# EAGLE board p2gs-001 (EAGLE 9.6.2)
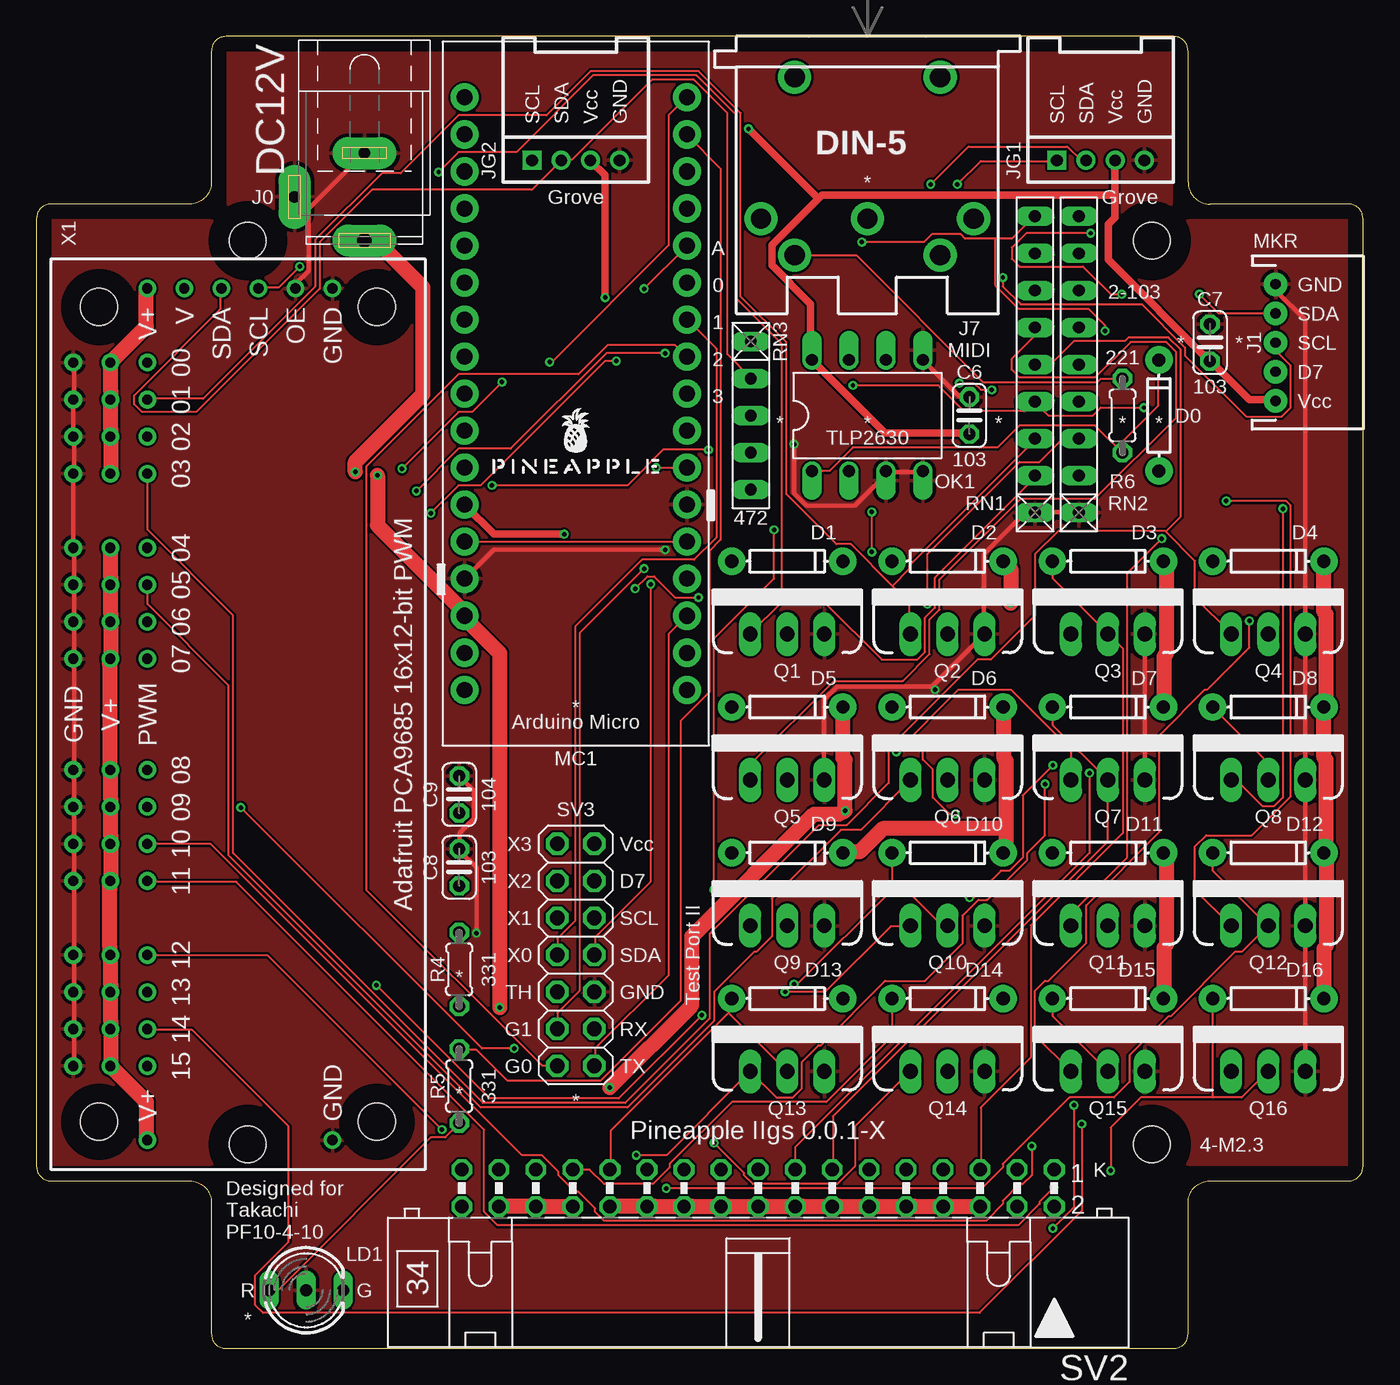
[diagram p0: board, top side]
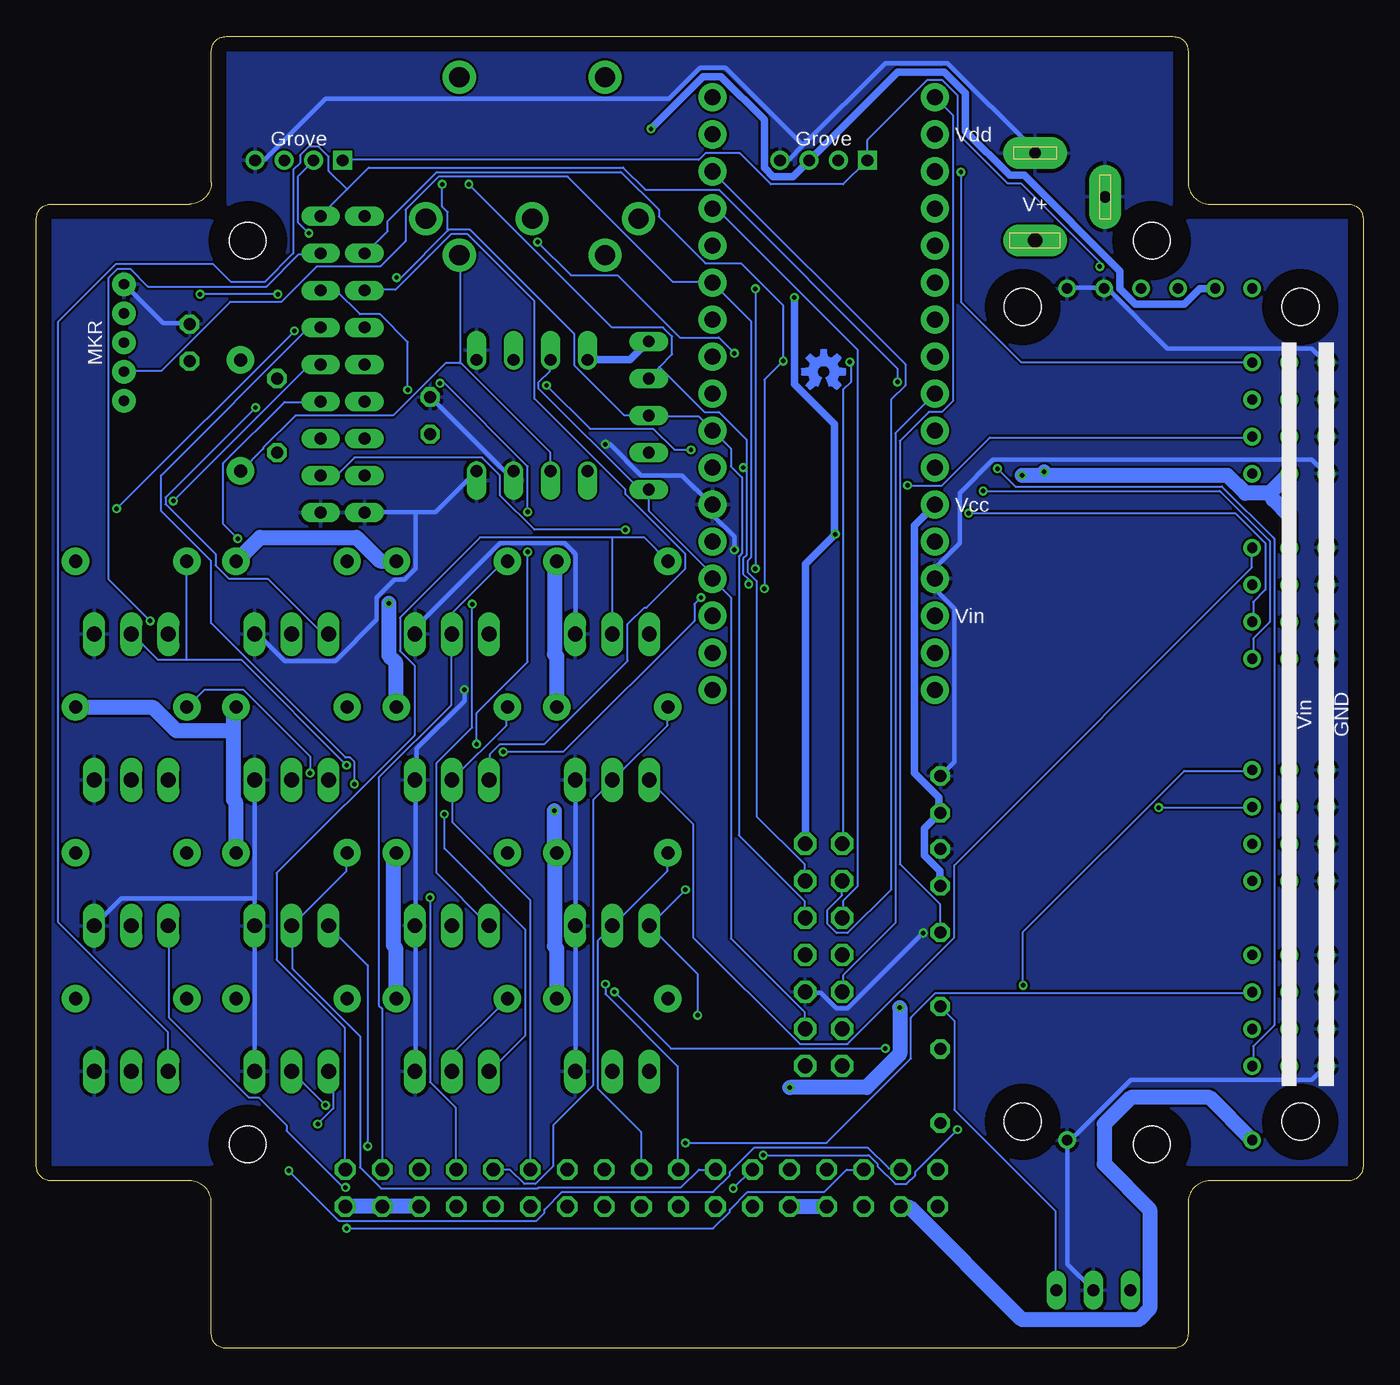
[diagram p1: board, bottom side, seen from below]

Size 91 x 90 mm. Coordinates in mm from the lower left corner, seen from the top.
Outline: 78,90 13,90 arc90 12,89 12,80 arc-90 10.5,78.5 1,78.5 arc90 0,77.5 0,12.5 arc90 1,11.5 10.5,11.5 arc-90 12,10 12,1 arc90 13,0 78,0 arc90 79,1 79,10 arc-90 80.5,11.5 90,11.5 arc90 91,12.5 91,77.5 arc90 90,78.5 80.5,78.5 arc-90 79,80 79,89 arc90 78,90
Copper layers (1*16): Top 0.035mm / dielectric 1.5mm / Bottom 0.035mm
Design rules "SeeedStudio_2layer_DRU_no_angle_20140221": minimum track width 6mil, minimum drill 12mil, track to track 6mil, track to pad 6mil, pad to pad 6mil, via to via 6mil, smd to smd 0mil, copper to edge 10mil, drill to drill 10mil, minimum pad ring 10mil, minimum via ring 6mil, stop-mask expansion 2mil, vias tented up to drill 100mil, thermal gap 10mil
Net classes: 0 default: width 0.152 mm, drill 0.152 mm, clearance 0.152 mm; 1 gnd: width 0.305 mm, drill 0.152 mm, clearance 0.152 mm; 2 power: width 0.508 mm, drill 0.152 mm, clearance 0.152 mm; 3 analog: width 0.305 mm, drill 0.152 mm, clearance 0.152 mm; 4 superpower: width 1.016 mm, drill 0.152 mm, clearance 0.152 mm
Holes 2.5 mm at 76.5,76 14.5,76 76.5,14 14.5,14
tRestrict: area 11.9,73.4 to 17.1,78.6; area 73.9,73.4 to 79.1,78.6; area 73.9,11.4 to 79.1,16.6; area 12,89 to 79,90; area 90,11.5 to 91,78.5; area 12,0 to 79,1; area 0,11.5 to 1,78.5; area 0,77.5 to 12,78.5; area 12,78.5 to 13,90; area 78,78.5 to 79,90; area 79,77.5 to 91,78.5; area 79,11.5 to 91,12.5; 8 more areas
bRestrict: area 11.9,11.4 to 17.1,16.6; area 73.9,11.4 to 79.1,16.6; area 73.9,73.4 to 79.1,78.6; area 11.9,73.4 to 17.1,78.6; area 78,0 to 79,11.5; area 79,11.5 to 91,12.5; area 90,11.5 to 91,78.5; area 79,77.5 to 91,78.5; area 78,78.5 to 79,90; area 12,89 to 79,90; area 12,78.5 to 13,90; area 0,77.5 to 12,78.5; 8 more areas

## Footprints (pad centres in the part's own frame; a part is rotated, then mirrored left to right if it is on the bottom)
C025-024X044 = drill 0.813 octagon: 1 -1.27,0; 2 1.27,0
DIODE-1N4148 = drill 0.9 pad 1.88: A -3.81,0; C 3.81,0
SPC4077 = drill 0.8 pad 2.184 long: 1 -3,0; 2 0,-4.8 | drill 1 pad 2.184 long: 3 3,0
JST-5-PTH = drill 0.7 pad 1.6: 1 -4,0; 2 -2,0; 3 0,0; 4 2,0; 5 4,0
DIN5-RA-PTH = drill 1.4 pad 2.286: 1 7.3,12.5; 2 0,12.5; 3 -7.3,12.5; 4 5,15; 5 -5,15; 6 -5,2.8; 7 5,2.8
4P-2.0-90D = drill 0.8 pad 1.27 square: 1 -3,0 | drill 0.8 pad 1.27: 2 -1,0; 3 1,0; 4 3,0
DUOLED-C-5MM = drill 0.813 long: AR 2.54,0; AX -2.54,0; C 0,0
ARDUINOMICRO = drill 1.1 pad 1.93: P$1 -20.32,7.62; P$2 -17.78,7.62; P$3 -15.24,7.62; P$4 -12.7,7.62; P$5 -10.16,7.62; P$6 -7.62,7.62; P$7 -5.08,7.62; P$8 -2.54,7.62; P$9 0,7.62; P$10 2.54,7.62; P$11 5.08,7.62; P$12 12.7,-7.62; P$13 10.16,-7.62; P$14 12.7,7.62; P$15 15.24,7.62; P$16 17.78,7.62; P$17 20.32,7.62; P$18 20.32,-7.62; P$19 17.78,-7.62; P$20 15.24,-7.62; P$21 7.62,7.62; P$22 10.16,7.62; P$23 7.62,-7.62; P$24 5.08,-7.62; P$25 2.54,-7.62; P$26 0,-7.62; P$27 -2.54,-7.62; P$28 -5.08,-7.62; P$29 -7.62,-7.62; P$30 -10.16,-7.62; P$31 -12.7,-7.62; P$32 -15.24,-7.62; P$33 -17.78,-7.62; P$34 -20.32,-7.62
DIL08 = drill 0.813 offset: 1 -3.81,-3.81; 2 -1.27,-3.81; 3 1.27,-3.81; 4 3.81,-3.81; 5 3.81,3.81; 6 1.27,3.81; 7 -1.27,3.81; 8 -3.81,3.81
TO220V = drill 1.016 long: 1 -2.54,0; 2 0,0; 3 2.54,0
0204/5 = drill 0.813 octagon: 1 -2.54,0; 2 2.54,0
RN-9 = drill 0.813 long: 1 -10.16,0; 2 -7.62,0; 3 -5.08,0; 4 -2.54,0; 5 0,0; 6 2.54,0; 7 5.08,0; 8 7.62,0; 9 10.16,0
RN-5 = drill 0.813 long: 1 -5.08,0; 2 -2.54,0; 3 0,0; 4 2.54,0; 5 5.08,0
ML34L = drill 0.914 octagon: 1 -20.32,-1.27; 2 -20.32,1.27; 3 -17.78,-1.27; 4 -17.78,1.27; 5 -15.24,-1.27; 6 -15.24,1.27; 7 -12.7,-1.27; 8 -12.7,1.27; 9 -10.16,-1.27; 10 -10.16,1.27; 11 -7.62,-1.27; 12 -7.62,1.27; 13 -5.08,-1.27; 14 -5.08,1.27; 15 -2.54,-1.27; 16 -2.54,1.27; 17 0,-1.27; 18 0,1.27; 19 2.54,-1.27; 20 2.54,1.27; 21 5.08,-1.27; 22 5.08,1.27; 23 7.62,-1.27; 24 7.62,1.27; 25 10.16,-1.27; 26 10.16,1.27; 27 12.7,-1.27; 28 12.7,1.27; 29 15.24,-1.27; 30 15.24,1.27; 31 17.78,-1.27; 32 17.78,1.27; 33 20.32,-1.27; 34 20.32,1.27
2X07 = drill 1.016 octagon: 1 -7.62,-1.27; 2 -7.62,1.27; 3 -5.08,-1.27; 4 -5.08,1.27; 5 -2.54,-1.27; 6 -2.54,1.27; 7 0,-1.27; 8 0,1.27; 9 2.54,-1.27; 10 2.54,1.27; 11 5.08,-1.27; 12 5.08,1.27; 13 7.62,-1.27; 14 7.62,1.27
ADAFRUIT-PCA9685-FOOTPRINT = drill 0.7 pad 1: GND00 -24.13,1.524; GND01 -21.59,1.524; GND02 -19.05,1.524; GND03 -16.51,1.524; GND04 -11.43,1.524; GND05 -8.89,1.524; GND06 -6.35,1.524; GND07 -3.81,1.524; GND08 3.81,1.524; GND09 6.35,1.524; GND10 8.89,1.524; GND11 11.43,1.524; GND12 16.51,1.524; GND13 19.05,1.524; GND14 21.59,1.524; GND15 24.13,1.524; LGND -29.21,19.304; LOE -29.21,16.764; LSCL -29.21,14.224; LSDA -29.21,11.684; LV+ -29.21,6.604; LVCC -29.21,9.144; PWM00 -24.13,6.604; PWM01 -21.59,6.604; PWM02 -19.05,6.604; PWM03 -16.51,6.604; PWM04 -11.43,6.604; PWM05 -8.89,6.604; PWM06 -6.35,6.604; PWM07 -3.81,6.604; PWM08 3.81,6.604; PWM09 6.35,6.604; PWM10 8.89,6.604; PWM11 11.43,6.604; PWM12 16.51,6.604; PWM13 19.05,6.604; PWM14 21.59,6.604; PWM15 24.13,6.604; RGND 29.21,19.304; RV+ 29.21,6.604; V+00 -24.13,4.064; V+01 -21.59,4.064; V+02 -19.05,4.064; V+03 -16.51,4.064; V+04 -11.43,4.064; V+05 -8.89,4.064; V+06 -6.35,4.064; V+07 -3.81,4.064; V+08 3.81,4.064; V+09 6.35,4.064; V+10 8.89,4.064; V+11 11.43,4.064; V+12 16.51,4.064; V+13 19.05,4.064; V+14 21.59,4.064; V+15 24.13,4.064 | hole 2.54: -27.94,3.302; 27.94,3.302; -27.94,22.352; 27.94,22.352

## Placement (x,y rotation side)
C6  10n  [C025-024X044]  64,64 90 top
C7  10n  [C025-024X044]  80.5,69 90 top
C8  10n  [C025-024X044]  29,33 90 top
C9  100n  [C025-024X044]  29,38 90 top
D0  [DIODE-1N4148]  77,64 90 top
D1  200mA/100V/1V  [DIODE-1N4148]  51.5,54 0 top
D2  200mA/100V/1V  [DIODE-1N4148]  62.5,54 0 top
D3  200mA/100V/1V  [DIODE-1N4148]  73.5,54 0 top
D4  200mA/100V/1V  [DIODE-1N4148]  84.5,54 0 top
D5  200mA/100V/1V  [DIODE-1N4148]  51.5,44 0 top
D6  200mA/100V/1V  [DIODE-1N4148]  62.5,44 0 top
D7  200mA/100V/1V  [DIODE-1N4148]  73.5,44 0 top
D8  200mA/100V/1V  [DIODE-1N4148]  84.5,44 0 top
D9  200mA/100V/1V  [DIODE-1N4148]  51.5,34 0 top
D10  200mA/100V/1V  [DIODE-1N4148]  62.5,34 0 top
D11  200mA/100V/1V  [DIODE-1N4148]  73.5,34 0 top
D12  200mA/100V/1V  [DIODE-1N4148]  84.5,34 0 top
D13  200mA/100V/1V  [DIODE-1N4148]  51.5,24 0 top
D14  200mA/100V/1V  [DIODE-1N4148]  62.5,24 0 top
D15  200mA/100V/1V  [DIODE-1N4148]  73.5,24 0 top
D16  200mA/100V/1V  [DIODE-1N4148]  84.5,24 0 top
J0  12V  [SPC4077]  22.5,79 270 top
J1  MKR  [JST-5-PTH]  85,69 270 top
J7  DIN5  [DIN5-RA-PTH]  57,90 180 top
JG1  Grove/1  [4P-2.0-90D]  73,81.5 0 top
JG2  Grove/2  [4P-2.0-90D]  37,81.5 0 top
LD1  Red/Green  [DUOLED-C-5MM]  18.5,4 0 top
LOGO1  OSHW-LOGOS-COPPER  [OSHW-LOGO-S_COPPER]  37,67 0 bottom
MC1  ARDUINOMICRO  [ARDUINOMICRO]  37,65.5 270 top
OK1  HCPL2630  [DIL08]  57,64 0 top
Q1  60V/32A/35mΩ  [TO220V]  51.5,49 0 top
Q2  60V/32A/35mΩ  [TO220V]  62.5,49 0 top
Q3  60V/32A/35mΩ  [TO220V]  73.5,49 0 top
Q4  60V/32A/35mΩ  [TO220V]  84.5,49 0 top
Q5  60V/32A/35mΩ  [TO220V]  51.5,39 0 top
Q6  60V/32A/35mΩ  [TO220V]  62.5,39 0 top
Q7  60V/32A/35mΩ  [TO220V]  73.5,39 0 top
Q8  60V/32A/35mΩ  [TO220V]  84.5,39 0 top
Q9  60V/32A/35mΩ  [TO220V]  51.5,29 0 top
Q10  60V/32A/35mΩ  [TO220V]  62.5,29 0 top
Q11  60V/32A/35mΩ  [TO220V]  73.5,29 0 top
Q12  60V/32A/35mΩ  [TO220V]  84.5,29 0 top
Q13  60V/32A/35mΩ  [TO220V]  51.5,19 0 top
Q14  60V/32A/35mΩ  [TO220V]  62.5,19 0 top
Q15  60V/32A/35mΩ  [TO220V]  73.5,19 0 top
Q16  60V/32A/35mΩ  [TO220V]  84.5,19 0 top
R4  330  [0204/5]  29,26 90 top
R5  330  [0204/5]  29,18 90 top
R6  220  [0204/5]  74.5,64 90 top
RN1  10k  [RN-9]  68.5,67.5 90 top
RN2  10k  [RN-9]  71.5,67.5 90 top
RN3  4.7k  [RN-5]  49,64 270 top
SV2  LD  [ML34L]  49.5,11 180 top
SV3  Testport II  [2X07]  37,27 90 top
U$1  PINEAPPLE450_SILK  [PINEAPPLE450_SILK]  37,60 0 top
X1  ADAFRUIT-PCA9685  [ADAFRUIT-PCA9685-FOOTPRINT]  1,43.5 270 top

## Library data of the parts
C6-C9 R4-R6 = resistor
D0 D1-D16 = SparkFun-DiscreteSemi; PROD_ID: DIO-08378
J0 = con-jack; OC_FARNELL: unknown; OC_NEWARK: unknown
J1 = SparkFun-Connectors; SF_ID: PRT-09917
J7 = SparkFun-Connectors; PROD_ID: CONN-09481
JG1 JG2 = Connector
LD1 = led
LOGO1 = SparkFun-Aesthetics
MC1 = adafruit
OK1 = optocoupler; MF: AGILENT TECHNOLOGIES; MPN: HCPL-2630-000E; OC_FARNELL: 9994904; OC_NEWARK: 88H7813
Q1-Q16 = SparkFun-DiscreteSemi; PROD_ID: TRANS-10060
RN1-RN3 = resistor-net; OC_FARNELL: unknown; OC_NEWARK: unknown
SV2 = con-ml; OC_FARNELL: unknown; OC_NEWARK: unknown
SV3 = pinhead
U$1 = pineapple
X1 = adafruit-pca9685

## Nets
ANLG0 [analog]: MC1.P$31
ANLG1 [analog]: MC1.P$30
ANLG2 [analog]: MC1.P$29
ANLG3 [analog]: MC1.P$28
AREF: MC1.P$32
D7GATE: J1.4 MC1.P$6 SV3.11
DTCT0: MC1.P$7 SV3.8
DTCT1: MC1.P$4 SV3.10
DTCT2: MC1.P$3 SV3.12
DTCT3: MC1.P$1 SV3.14
GND [gnd]: C6.2 C7.2 C8.2 C9.2 J0.1 J0.2 J1.1 JG1.4 JG2.4 LD1.C MC1.P$12 MC1.P$21 OK1.3 OK1.4 OK1.5 Q1.3 Q2.3 Q3.3 Q4.3 Q5.3 Q6.3 Q7.3 Q8.3 Q9.3 Q10.3 Q11.3 Q12.3 Q13.3 Q14.3 Q15.3 Q16.3 RN1.1 RN2.1 SV3.5 X1.GND00 X1.GND01 X1.GND02 X1.GND03 X1.GND04 X1.GND05 X1.GND06 X1.GND07 X1.GND08 X1.GND09 X1.GND10 X1.GND11 X1.GND12 X1.GND13 X1.GND14 X1.GND15 X1.LGND X1.LOE X1.RGND
GPIO0: MC1.P$8 SV3.2
GPIO1: MC1.P$5 SV3.4
LD00: D1.A Q1.2 SV2.1
LD01: D2.A Q2.2 SV2.3
LD02: D3.A Q3.2 SV2.5
LD03: D4.A Q4.2 SV2.7
LD04: D5.A Q5.2 SV2.9
LD05: D6.A Q6.2 SV2.11
LD06: D7.A Q7.2 SV2.13
LD07: D8.A Q8.2 SV2.15
LD08: D9.A Q9.2 SV2.17
LD09: D10.A Q10.2 SV2.19
LD10: D11.A Q11.2 SV2.21
LD11: D12.A Q12.2 SV2.23
LD12: D13.A Q13.2 SV2.25
LD13: D14.A Q14.2 SV2.27
LD14: D15.A Q15.2 SV2.29
LD15: D16.A Q16.2 SV2.31
LED0: MC1.P$34 R4.2
LED0A: LD1.AR R4.1
LED1: MC1.P$2 R5.2
LED1A: LD1.AX R5.1
MIDIINSND: D0.C OK1.1 R6.1
MIRTN: D0.A J7.5 OK1.2
MISND: J7.4 R6.2
MISO: MC1.P$19
MNTR: MC1.P$27
MOSI: MC1.P$17
PWM00: Q1.1 RN1.2 X1.PWM00
PWM01: Q2.1 RN1.3 X1.PWM01
PWM02: Q3.1 RN1.4 X1.PWM02
PWM03: Q4.1 RN1.5 X1.PWM03
PWM04: Q5.1 RN1.6 X1.PWM04
PWM05: Q6.1 RN1.7 X1.PWM05
PWM06: Q7.1 RN1.8 X1.PWM06
PWM07: Q8.1 RN1.9 X1.PWM07
PWM08: Q9.1 RN2.2 X1.PWM08
PWM09: Q10.1 RN2.3 X1.PWM09
PWM10: Q11.1 RN2.4 X1.PWM10
PWM11: Q12.1 RN2.5 X1.PWM11
PWM12: Q13.1 RN2.6 X1.PWM12
PWM13: Q14.1 RN2.7 X1.PWM13
PWM14: Q15.1 RN2.8 X1.PWM14
PWM15: Q16.1 RN2.9 X1.PWM15
RLY: MC1.P$9
RST: MC1.P$13 MC1.P$22
RX: MC1.P$14 OK1.7 RN3.5 SV3.3
SCK: MC1.P$18
SCL: J1.3 JG1.1 JG2.1 MC1.P$10 RN3.3 SV3.9 X1.LSCL
SDA: J1.2 JG1.2 JG2.2 MC1.P$11 RN3.2 SV3.7 X1.LSDA
THS: MC1.P$26 SV3.6
TX: MC1.P$15 SV3.1
VCC [power]: C6.1 C7.1 C8.1 C9.1 J1.5 JG1.3 JG2.3 MC1.P$23 OK1.8 RN3.1 SV3.13 X1.LVCC
VDD [power]: MC1.P$33
VIN [superpower]: D1.C D2.C D3.C D4.C D5.C D6.C D7.C D8.C D9.C D10.C D11.C D12.C D13.C D14.C D15.C D16.C J0.3 MC1.P$20 SV2.2 SV2.4 SV2.6 SV2.8 SV2.10 SV2.12 SV2.14 SV2.16 SV2.18 SV2.20 SV2.22 SV2.24 SV2.26 SV2.28 SV2.30 SV2.32 X1.LV+ X1.RV+ X1.V+00 X1.V+01 X1.V+02 X1.V+03 X1.V+04 X1.V+05 X1.V+06 X1.V+07 X1.V+08 X1.V+09 X1.V+10 X1.V+11 X1.V+12 X1.V+13 X1.V+14 X1.V+15

## Tracks (layer width: path | path; a pad name or v marks a point on that pad's centre or on a via)
D7GATE
  Bottom 0.152: SV3.11 38.33,32.08 38.33,33.22 41.6,36.5 41.6,52.65 42.22,53.26 42.22,54.03 41.99,54.25 41.99,70.48 44.58,73.08 MC1.P$6 44.65,73.15 47.32,73.15 54.56,80.39 63.4,80.39 65.68,78.11 65.68,75.97 67.44,74.22 71.78,74.22 74.22,71.78 77.72,71.78 82.45,67.06 84.96,67.06 J1.4
DTCT0
  Top 0.152: SV3.8 35.74,27.05 35.74,28.12 36.96,29.34 36.96,49.53 41.53,54.1 45.11,54.1 46.63,55.63 46.63,68.58 44.65,70.56 MC1.P$7
DTCT1
  Bottom 0.152: SV3.10 35.66,29.57 35.66,30.71 34.67,31.7 34.67,68.5 44.35,78.18 44.58,78.18 MC1.P$4
DTCT2
  Bottom 0.152: SV3.12 35.74,32 35.74,31.09 36.73,30.1 36.73,29.11 36.12,28.5 35.36,28.5 32.38,31.47 32.38,65.08 31.39,66.06 31.39,67.51 44.58,80.7 MC1.P$3
DTCT3  (via drill 0.3)
  Top 0.152: v35.2,67.67 35.36,67.67 43.36,75.67 43.36,84.58 44.58,85.8 MC1.P$1
  Bottom 0.152: v35.2,67.67 35.13,67.59 35.13,66.29 35.66,65.76 35.66,34.67 SV3.14
GND  (via drill 0.3)
  Top 0.305: Q3.3 76.05,39.01 Q7.3 | Q16.3 87.02,19.05 87.02,28.96 Q12.3 87.02,29.11 87.02,38.94 Q8.3 87.02,39.09 87.02,49 Q4.3 87.02,49.15 87.02,70.56 85.04,72.54 85.04,73 J1.1 | RN2.1 71.48,57.38 68.5,57.38 RN1.1 68.35,57.3 67.82,57.3 65,54.48 65,49.07 Q2.3 64.92,48.92 61.42,45.41 | OK1.4 60.81,60.12 58.29,60.12 OK1.3 58.29,59.97 56.16,57.84 52.81,57.84 51.97,58.67 v51.97,62.03 | C6.2 63.93,65.3 63.32,65.3 60.88,67.74 OK1.5 | 61.42,45.41 54.94,45.41 54.03,44.5 54.03,39.01 Q5.3 | 61.42,45.41 v61.65,45.19 | X1.LOE 17.83,72.77 17.83,73.08 18.67,73.91 18.67,78.03 17.75,78.94 J0.2 18.67,78.18 22.48,81.99 J0.1 | C9.2 29.03,39.24 30.02,38.25 30.02,36.35 29.03,35.36 29.03,34.29 C8.2 29.03,34.14 30.18,32.99 v30.18,28.5 | v43.13,54.79 31.39,54.79 29.41,52.81 MC1.P$12 | X1.GND00 2.59,67.59 2.59,65.15 X1.GND01 2.52,65 2.52,62.64 X1.GND02 2.59,62.48 2.59,60.05 X1.GND03 2.52,59.89 2.52,55.02 X1.GND04 2.59,54.86 2.59,52.5 X1.GND05 2.59,52.35 2.59,49.99 X1.GND06 2.59,49.84 2.59,47.32 X1.GND07 2.59,47.17 2.59,39.78 X1.GND08 2.59,39.62 2.59,37.26 X1.GND09 2.59,37.11 2.59,34.75 X1.GND10 2.59,34.59 2.59,32.08 X1.GND11 2.59,31.93 2.59,27.13 X1.GND12 2.59,26.98 2.59,24.54 X1.GND13 2.59,24.38 2.59,22.02 X1.GND14 2.59,21.87 2.59,19.43 X1.GND15
  Bottom 0.305: Q15.3 76.05,19.05 76.05,28.96 Q11.3 76.05,29.11 76.05,30.86 | 76.05,30.86 76.05,38.94 Q7.3 | C7.2 80.54,70.33 82.3,70.33 84.96,73 J1.1 | 76.05,30.86 85.19,30.86 87.02,29.03 Q12.3 | Q14.3 65,19.05 65,28.96 Q10.3 65,29.11 65,38.94 Q6.3 64.92,39.09 64.92,41.15 61.65,44.42 v61.65,45.19 | Q13.3 54.03,19.05 54.03,28.96 Q9.3 54.03,29.11 54.03,38.94 Q5.3 | Q1.3 54.03,49.07 54.03,54.48 54.79,55.24 59.21,55.24 65,49.45 65,49.07 Q2.3 | OK1.3 58.29,60.2 58.9,60.2 63.93,65.23 C6.2 | 65,57.38 63.63,57.38 60.88,60.12 OK1.4 | 65,57.38 68.43,57.38 RN1.1 | 65,57.38 65,53.49 65.76,52.73 66.45,52.73 67.67,51.51 67.67,49.99 70.48,47.17 73.99,47.17 75.82,49 75.97,49 Q3.3 | X1.LGND 20.27,72.77 17.83,72.77 X1.LOE 17.68,72.62 17.45,72.62 13.41,68.58 3.5,68.58 2.59,67.67 X1.GND00 | 38.41,82.53 32.77,88.16 28.5,88.16 22.55,82.22 22.55,82.07 J0.1 | 38.41,82.53 39.4,81.53 39.93,81.53 JG2.4 | 38.41,82.53 43.74,87.86 45.49,87.86 47.62,85.72 71.17,85.72 75.36,81.53 75.97,81.53 JG1.4 | v30.18,28.5 35.36,23.32 36.12,23.32 37.19,24.38 38.25,24.38 SV3.5 | C9.2 28.96,39.32 28.04,40.23 28.04,50.75 29.34,52.05 29.34,52.73 MC1.P$12 29.26,52.88 29.26,53.65 27.66,55.24 27.66,58.67 25.38,60.96 3.5,60.96 2.59,60.05 X1.GND03 | v43.13,54.79 43.13,55.7 44.58,57.15 44.58,57.84 MC1.P$21 44.73,57.91 46.71,59.89 49.53,59.89 51.66,62.03 v51.97,62.03 | LD1.C 18.52,4.04 20.27,5.79 20.27,14.25 X1.RGND 20.12,14.25 15.93,18.44 3.5,18.44 2.59,19.36 X1.GND15
  pour Top: -1,-1 92,-1 92,91 -0.5,91 -1,91
  pour Bottom: -2,-2 93,-2 93,92 -2,92
GPIO0
  Top 0.152: SV3.2 35.66,19.43 34.67,19.43 22.63,31.47 22.63,60.5 28.96,66.83 37.19,66.83 39.17,68.81 43.81,68.81 44.58,68.05 MC1.P$8
GPIO1  (via drill 0.3)
  Top 0.152: v41.68,53.49 37.26,49.07 37.26,24.54 35.74,23.01 35.74,21.95 SV3.4 | v41.68,72.69 44.58,75.59 MC1.P$5
  Bottom 0.152: v41.68,72.69 v41.68,53.49
LD00
  Bottom 0.152: 51.51,55.63 49.3,55.63 47.7,54.03 D1.A | 51.51,55.63 60.58,55.63 66.06,50.14 66.06,47.85 65.08,46.86 65.08,42.06 74.52,32.61 74.52,26.67 69.88,22.02 69.88,12.34 SV2.1 | 51.51,55.63 51.51,49.07 Q1.2
LD01
  Bottom 0.152: SV2.3 67.28,12.34 67.28,23.32 67.51,23.55 67.51,39.17 62.56,44.12 62.56,49 Q2.2 62.48,49.07 62.48,50.44 58.98,53.95 58.75,53.95 D2.A
LD02
  Top 0.152: SV2.5 64.77,12.34 64.77,16.54 68.2,19.96 68.2,29.03 74.52,35.36 74.52,48.01 73.53,49 Q3.2 73.46,49.07 69.72,52.81 69.72,53.95 D3.A
LD03  (via drill 0.3)
  Top 0.152: v64.01,30.94 64.31,30.94 66.14,32.77 66.75,32.77 67.67,33.68 67.67,37.95 v69.72,40.01
  Bottom 0.152: v64.01,30.94 64.01,18.29 62.26,16.54 62.26,12.34 SV2.7 | v69.72,40.01 76.96,47.24 80.7,47.24 | 80.7,47.24 82.68,47.24 84.43,49 Q4.2 | 80.7,47.24 80.7,53.95 D4.A
LD04
  Bottom 0.152: SV2.9 59.59,12.27 58.52,12.27 57.53,11.28 56.77,11.28 55.55,12.5 55.55,15.32 52.81,18.06 52.81,37.64 51.51,38.94 Q5.2 51.44,39.01 47.7,42.75 47.7,43.97 D5.A
LD05
  Bottom 0.152: SV2.11 57.15,12.34 57.15,30.79 62.48,36.12 62.48,38.94 Q6.2 62.48,39.01 58.75,42.75 58.75,43.97 D6.A
LD06
  Top 0.152: SV2.13 54.63,12.34 54.63,15.93 73.46,34.75 73.46,38.94 Q7.2 73.46,39.01 69.72,42.75 69.72,43.97 D7.A
LD07  (via drill 0.3)
  Top 0.152: v72.24,39.47 72.24,33.98 52.05,13.79 52.05,12.34 SV2.15 | Q8.2 84.43,39.01 84.43,40.23 80.7,43.97 D8.A
  Bottom 0.152: v72.24,39.47 72.24,40.62 76.81,45.19 79.48,45.19 80.62,44.04 D8.A
LD08
  Bottom 0.152: SV2.17 49.53,12.34 49.53,14.86 52.5,17.83 52.5,27.96 51.51,28.96 Q9.2 51.44,29.03 47.7,32.77 47.7,33.98 D9.A
LD09  (via drill 0.3)
  Top 0.152: v51.97,24.99 52.2,24.99 58.64,31.43 | 58.64,31.43 58.67,31.47 58.67,33.98 D10.A | Q10.2 62.48,29.03 62.1,29.03 59.74,31.39 58.67,31.39 58.64,31.43
  Bottom 0.152: v51.97,24.99 51.97,24.31 47.02,19.36 47.02,12.34 SV2.19
LD10
  Bottom 0.152: SV2.21 45.57,12.27 46.79,11.05 56.54,11.05 56.62,10.97 67.36,10.97 68.81,12.42 68.81,21.41 73.46,26.06 73.46,28.96 Q11.2 73.46,29.03 69.72,32.77 69.72,33.98 D11.A
LD11  (via drill 0.3)
  Top 0.152: v43.2,10.97 64.85,10.97 66.29,12.42 66.29,12.65 70.87,17.22 73.91,17.22 74.98,18.29 74.98,20.12 77.65,22.78 77.8,22.78 82.22,27.2 82.68,27.2 84.43,28.96 Q12.2 84.43,29.03 80.7,32.77 80.7,33.98 D12.A
  Bottom 0.152: v43.2,10.97 41.91,12.27 SV2.23
LD12
  Top 0.152: 47.47,23.01 47.62,23.16 47.62,23.93 D13.A | 47.47,23.01 39.4,14.94 39.4,12.34 SV2.25 | 47.47,23.01 51.44,19.05 Q13.2
LD13
  Top 0.152: SV2.27 37.95,12.27 38.94,11.28 42.29,11.28 43.43,12.42 43.43,12.65 47.7,16.92 54.18,16.92 58.67,21.41 58.67,23.93 D14.A
  Bottom 0.152: Q14.2 62.48,19.05 62.48,20.19 58.75,23.93 D14.A
LD14  (via drill 0.3)
  Top 0.152: v69.72,8.23 71.17,9.68 v71.17,16.69 | D15.A 69.72,23.93 69.72,22.78 73.46,19.05 Q15.2
  Bottom 0.152: v69.72,8.23 44.58,8.23 43.43,9.37 43.43,9.53 42.22,10.74 36.96,10.74 35.43,12.27 34.29,12.27 SV2.29 | v71.17,16.69 73.46,18.97 Q15.2
LD15  (via drill 0.3)
  Top 0.152: v73.69,12.19 73.69,15.16 75.74,17.22 80.7,17.22 | 80.7,17.22 82.68,17.22 84.43,18.97 Q16.2 | 80.7,17.22 80.7,23.93 D16.A
  Bottom 0.152: v73.69,12.19 70.26,8.76 56.69,8.76 56.16,9.3 56.16,9.53 54.94,10.74 44.58,10.74 43.43,11.89 43.43,12.12 41.76,13.79 33.98,13.79 32.54,12.34 31.77,12.34 SV2.31
LED0
  Bottom 0.152: R4.2 29.03,28.57 29.03,30.48 31.77,33.22 31.77,62.26 29.79,64.24 28.88,64.24 28.12,65 28.12,84.58 29.34,85.8 MC1.P$34
LED0A
  Bottom 0.152: LD1.AR 21.11,4.04 21.11,9.45 28.04,16.38 28.04,22.48 28.96,23.39 R4.1
LED1
  Top 0.152: R5.2 29.03,20.5 30.18,20.5 32.31,18.36 38.71,18.36 44.2,23.85 44.2,43.05 46.18,45.03 46.18,54.71 46.94,55.47 46.94,80.92 44.65,83.21 MC1.P$2
LED1A
  Top 0.152: LD1.AX 16,4.04 16.61,4.04 27.05,14.48 28.04,14.48 28.96,15.39 R5.1
MIDIINSND
  Top 0.152: OK1.1 53.26,60.2 54.41,60.2 56.01,61.8 65.91,61.8 67.44,63.32 72.62,63.32 74.45,61.49 R6.1 74.14,61.87 76.96,64.69 76.96,67.74 D0.C
MIRTN
  Bottom 0.152: 61.91,67.63 61.95,67.67 61.95,74.98 J7.5 | 61.91,67.63 55.78,61.49 55.78,60.2 OK1.2 | D0.A 76.96,60.2 75.44,61.72 75.44,61.8 73.23,64.01 66.52,64.01 62.94,67.59 61.95,67.59 61.91,67.63
MISND
  Top 0.152: R6.2 74.45,66.52 73,66.52 72.77,66.29 64.92,66.29 56.24,74.98 52.05,74.98 J7.4
PWM00  (via drill 0.3)
  Top 0.152: v27.58,80.7 28.96,82.07 32.92,82.07 38.18,87.33 45.26,87.33 48.01,84.58 48.01,72.01 51.13,68.89 51.13,51.21 51.09,51.17 | 51.09,51.17 49,49.07 Q1.1 | RN1.2 68.43,59.82 68.43,59.66 61.65,52.88 61.65,50.83 60.96,50.14 60.96,47.78 60.43,47.24 57.99,47.24 54.1,51.13 51.13,51.13 51.09,51.17
  Bottom 0.152: v27.58,80.7 27.58,71.78 23.47,67.67 7.62,67.67 X1.PWM00
PWM01
  Top 0.152: 58.71,52.31 59.89,51.13 59.89,49.07 Q2.1 | 58.71,52.31 55.85,55.17 54.86,55.17 51.44,58.6 51.44,69.04 48.31,72.16 48.31,84.73 45.41,87.63 38.02,87.63 34.98,84.58 28.96,84.58 24.99,80.62 23.7,80.62 19.13,76.05 19.13,72.85 11.43,65.15 7.62,65.15 X1.PWM01 | 58.71,52.31 59.89,53.49 59.89,53.72 68.43,62.26 68.43,62.41 RN1.3
PWM02  (via drill 0.3)
  Top 0.152: v31.24,59.21 40.54,59.21 42.98,61.65 v46.1,61.65 | v56.01,66.06 61.87,66.06 63.63,64.31 67.82,64.31 68.43,64.92 RN1.4 68.5,64.92 69.42,64.01 72.47,64.01 73,64.54 v75.97,64.54
  Bottom 0.152: v31.24,59.21 28.88,59.21 25.6,62.48 7.62,62.48 X1.PWM02 | v46.1,61.65 47.24,61.65 48.69,63.09 53.03,63.09 v56.01,66.06 | v75.97,64.54 82.14,58.37 82.14,57.91 78.72,54.48 78.72,53.72 77.8,52.81 75.13,52.81 71.4,49.07 71.02,49.07 Q3.1
PWM03
  Top 0.152: 77.46,56.05 79.48,54.03 79.48,51.51 81.92,49.07 Q4.1 | 77.46,56.05 77.42,56.08 70.1,56.08 68.5,54.48 68.5,50.29 65.46,47.24 64.54,47.24 58.45,41.15 58.45,38.79 55.55,35.89 53.65,35.89 46.18,28.42 46.18,22.63 40.39,16.84 30.63,16.84 13.49,33.98 13.49,50.29 7.62,56.16 7.62,59.97 X1.PWM03 | 77.46,56.05 78.49,57.07 78.49,68.5 77.65,69.34 74.91,69.34 74.68,69.11 71.17,69.11 69.57,67.51 68.5,67.51 RN1.5
PWM04
  Top 0.152: RN1.6 68.43,70.03 68.43,69.42 66.9,67.89 66.9,67.13 67.44,66.6 72.62,66.6 75.06,69.04 77.5,69.04 78.18,68.35 78.18,63.86 72.62,58.29 67.51,58.29 61.95,52.73 61.95,50.67 61.27,49.99 61.27,47.62 59.44,45.8 54.71,45.8 49,40.08 49,39.01 Q5.1
  Bottom 0.152: X1.PWM04 7.62,54.86 7.62,53.57 28.04,33.15 28.04,28.19 35.36,20.88 38.63,20.88 45.95,28.19 45.95,35.97 48.92,38.94 Q5.1
PWM05
  Top 0.152: X1.PWM05 7.62,52.35 7.62,51.05 13.18,45.49 13.18,33.83 30.48,16.54 40.54,16.54 46.48,22.48 46.48,24.46 49.23,27.2 49.38,27.2 50.44,28.27 50.44,30.86 55.17,35.59 56.54,35.59 59.89,38.94 Q6.1
  Bottom 0.152: RN1.7 68.43,72.62 66.37,72.62 62.56,76.43 61.42,76.43 56.84,71.86 56.84,65.15 50.6,58.9 50.6,58.6 46.48,54.48 46.48,53.49 49.15,50.83 49.3,50.83 50.44,49.68 50.44,47.17 56.16,41.45 59.21,41.45 59.89,40.77 59.89,39.01 Q6.1
PWM06  (via drill 0.3)
  Top 0.152: v27.05,57.3 28.96,59.21 30.48,59.21 39.01,67.74 v39.78,67.74 | v58.98,40.92 63.25,45.19 66.83,45.19 70.94,41.07 70.94,39.01 Q7.1 | v45.41,51.51 43.81,51.51 42.37,52.96 41.91,52.96 v41.07,52.12
  Bottom 0.152: v27.05,57.3 8.76,57.3 6.71,55.24 6.71,52.05 7.54,51.21 7.54,49.91 X1.PWM06 | RN1.8 68.43,75.13 66.9,76.66 66.9,77.34 63.55,80.7 50.9,80.7 48.31,78.11 48.31,77.65 45.11,74.45 42.67,74.45 39.78,71.55 v39.78,67.74 41.07,66.45 v41.07,52.12 | v58.98,40.92 54.86,40.92 45.87,49.91 45.87,51.05 v45.41,51.51
PWM07  (via drill 0.3)
  Top 0.152: v26.06,58.83 28.96,61.72 32.54,61.72 39.09,68.28 v43.13,68.28 | v56.62,75.89 60.88,75.89 61.42,76.43 63.4,76.43 63.7,76.12 65.76,76.12 | 65.76,76.12 66.9,76.12 68.43,77.65 RN1.9 | v85.5,57.61 85.5,37.8 84.89,37.19 84.12,37.19 82.37,38.94 81.99,38.94 Q8.1 | v73.3,69.8 73.3,70.18 72.16,71.32 67.36,71.32 65.76,72.92 65.76,76.12
  Bottom 0.152: v26.06,58.83 9.83,58.83 6.4,55.4 6.4,49.84 7.54,48.69 7.54,47.32 X1.PWM07 | v43.13,68.28 44.2,69.34 46.86,69.34 51.13,73.61 54.33,73.61 v56.62,75.89 | v73.3,69.8 v85.5,57.61
PWM08  (via drill 0.3)
  Top 0.152: v23.32,24.92 31.09,17.14 39.93,17.14 v45.64,22.86 | v50.6,56.16 50.6,52.81 46.48,48.69 v46.48,31.47
  Bottom 0.152: v23.32,24.92 23.32,28.57 12.27,39.62 7.62,39.62 X1.PWM08 | v45.64,22.86 45.64,25.68 48.92,28.96 Q9.1 48.92,29.03 v46.48,31.47 | v50.6,56.16 56.84,56.16 59.21,58.52 59.21,59.89 60.43,61.11 69.19,61.11 70.41,59.89 71.48,59.89 RN2.2
PWM09  (via drill 0.3)
  Top 0.152: v14.02,37.11 30.56,20.57 v32.77,20.57 | v51.36,24.46 54.1,24.46 58.6,28.96 59.89,28.96 Q10.1 | v61.11,51.05 61.11,54.48 67.44,60.81 68.81,60.81 70.41,62.41 71.48,62.41 RN2.3
  Bottom 0.152: v14.02,37.11 7.62,37.11 X1.PWM09 | v32.77,20.57 47.47,20.57 v51.36,24.46 | v61.11,51.05 61.11,42.6 63.55,40.16 63.55,32.61 59.97,29.03 Q10.1
PWM10  (via drill 0.3)
  Top 0.152: v68.28,13.87 68.28,11.89 67.67,11.28 67.44,11.28 66.29,10.13 66.29,9.91 65.15,8.76 38.94,8.76 38.33,9.37 38.33,9.6 37.19,10.74 36.96,10.74 35.81,11.89 35.81,12.12 34.67,13.26 33.3,13.26 11.96,34.59 7.62,34.59 X1.PWM10 | v77.19,55.55 74.83,53.19 74.83,33.68 71.02,29.87 71.02,29.03 Q11.1
  Bottom 0.152: v68.28,13.87 68.28,26.29 70.94,28.96 Q11.1 | v77.19,55.55 78.18,56.54 78.18,60.73 73.99,64.92 71.55,64.92 RN2.4
PWM11  (via drill 0.3)
  Top 0.152: v69.8,11.05 68.81,10.06 68.81,9.91 67.36,8.46 31.62,8.46 30.71,9.37 30.71,15.01 13.72,32 7.62,32 X1.PWM11 | v81.61,58.14 85.72,58.14 86.03,57.84 86.03,37.87 83.36,35.2 80.24,35.2 79.48,34.44 79.48,31.47 81.92,29.03 Q12.1
  Bottom 0.152: v69.8,11.05 69.95,11.05 73.84,14.94 73.84,15.32 75.74,17.22 76.43,17.22 81.92,22.71 81.92,28.96 Q12.1 | v81.61,58.14 72.31,67.44 71.55,67.44 RN2.5
PWM12  (via drill 0.3)
  Top 0.152: v27.81,15.01 15.85,26.98 7.62,26.98 X1.PWM12 | v41.15,13.26 43.2,13.26 48.92,18.97 Q13.1 49,18.97 50.75,17.22 51.89,17.22 52.5,17.83 52.5,19.66 53.65,20.8 53.8,20.8 58.22,25.22 60.96,25.22 63.55,27.81 63.55,29.72 64.62,30.79 65.23,30.79 67.97,33.53 67.97,33.98 69.19,35.2 v69.19,38.71
  Bottom 0.152: v27.81,15.01 30.71,12.12 30.71,11.89 31.32,11.28 32.08,11.28 33.3,12.5 33.3,12.65 33.91,13.26 v41.15,13.26 | v69.19,38.71 69.19,40.23 69.49,40.54 69.8,40.54 79.02,49.76 79.02,54.03 82.45,57.45 82.45,59.89 72.31,70.03 71.55,70.03 RN2.6
PWM13  (via drill 0.3)
  Top 0.152: v46.48,14.1 48.54,12.04 48.54,11.89 49.15,11.28 54.94,11.28 56.16,12.5 56.16,15.24 59.89,18.97 Q14.1 | v65.53,65.76 64.77,65.76 64.31,66.22 v63.32,66.22 | v57.3,54.63 v57.3,57.38 | v60.81,41.45 60.81,40.39 61.49,39.7 61.49,37.8 62.64,36.65 v63.02,36.65
  Bottom 0.152: v46.48,14.1 36.8,14.1 31.01,19.89 31.01,22.71 29.34,24.38 7.62,24.38 X1.PWM13 | v65.53,65.76 65.53,69.04 67.44,70.94 68.81,70.94 70.41,72.54 71.48,72.54 RN2.7 | v63.32,66.22 63.02,66.22 57.3,60.5 v57.3,57.38 | v57.3,54.63 57.3,47.09 60.81,43.59 v60.81,41.45 | v63.02,36.65 63.02,34.29 57.45,28.73 57.45,21.49 59.89,19.05 Q14.1
PWM14  (via drill 0.3)
  Top 0.152: v71.7,15.39 71.7,9.45 64.69,2.44 15.54,2.44 15.01,2.97 15.01,5.03 17.3,7.32 17.3,15.24 10.67,21.87 7.62,21.87 X1.PWM14 | v83.21,49.91 83.21,48.08 80.31,45.19 80.16,45.19 77.04,42.06 77.04,35.43 72.01,30.4 72.01,27.81 69.42,25.22 69.19,25.22 68.5,24.54 68.5,21.49 70.94,19.05 Q15.1
  Bottom 0.152: v71.7,15.39 70.64,16.46 70.64,18.67 70.94,18.97 Q15.1 | v83.21,49.91 86.03,52.73 86.03,73.46 85.42,74.07 84.58,74.07 83.36,72.85 75.21,72.85 73,75.06 71.55,75.06 RN2.8
PWM15  (via drill 0.3)
  Top 0.152: v25.07,60.35 28.96,64.24 29.87,64.24 v31.93,66.29
  Bottom 0.152: v25.07,60.35 23.85,59.13 9.68,59.13 6.1,55.55 6.1,22.17 7.54,20.73 7.54,19.43 X1.PWM15 | v31.93,66.29 31.93,67.21 44.2,79.48 49.23,79.48 50.75,81 68.2,81 69.69,79.52 | 69.69,79.52 71.48,77.72 RN2.9 | 69.69,79.52 70.94,80.77 70.94,81.76 71.63,82.45 72.31,82.45 72.92,81.84 72.92,81.31 73.38,80.85 73.38,75.13 75.36,73.15 77.65,73.15 78.87,74.37 85.57,74.37 89.53,70.41 89.53,29.26 81.99,21.72 81.99,19.05 Q16.1
RST
  Top 0.152: MC1.P$13 29.41,55.32 44.58,55.32 MC1.P$22
RX
  Bottom 0.152: OK1.7 55.78,67.74 55.78,67.06 56.54,66.29 56.54,65.84 49.68,58.98 49.07,58.98 RN3.5 49,58.9 49,57.45 44.65,53.11 44.65,52.81 MC1.P$14 44.58,52.73 43.36,51.51 43.36,28.12 38.33,23.09 38.33,21.95 SV3.3
SCL  (via drill 0.3)
  Top 0.152: v18.06,74.22 16.61,72.77 15.24,72.77 X1.LSCL | v66.29,73.46 66.29,72.85 67.51,71.63 75.82,71.63 78.79,68.66 78.79,68.12 82.98,63.93 85.42,63.93 86.03,64.54 86.03,67.44 85.04,68.43 85.04,68.96 J1.3 | v63.17,79.86 64.77,81.46 69.95,81.46 JG1.1
  Bottom 0.152: v18.06,74.22 18.06,74.52 23.47,79.93 24.38,79.93 27.81,83.36 27.81,85.95 28.88,87.02 29.87,87.02 33.98,82.91 33.98,81.53 JG2.1 34.06,81.46 35.66,79.86 40.62,79.86 42.75,81.99 45.11,81.99 45.57,81.53 69.95,81.53 JG1.1 | SV3.9 38.33,29.57 38.33,30.71 42.82,35.2 42.82,54.33 42.6,54.56 42.6,59.74 43.36,60.5 43.36,61.72 44.58,62.94 MC1.P$10 44.65,63.02 45.57,63.93 49,63.93 RN3.3 49.07,64.01 50.67,64.01 54.1,67.44 54.1,69.57 61.27,76.73 62.71,76.73 62.75,76.69 | v66.29,73.46 65.99,73.46 62.75,76.69 | v63.17,79.86 63.17,78.33 62.79,77.95 62.79,76.73 62.75,76.69
SDA  (via drill 0.3)
  Top 0.152: X1.LSDA 12.65,72.69 12.65,71.32 6.71,65.38 6.71,64.77 7.24,64.24 10.97,64.24 19.43,72.69 19.43,75.89 23.01,79.48 33.98,79.48 35.97,81.46 JG2.2 36.04,81.53 36.73,81.53 42.22,87.02 45.11,87.02 47.4,84.73 47.4,68.2 49,66.6 RN3.2 | v61.34,79.86 63.93,82.45 70.71,82.45 71.63,81.53 71.93,81.53 JG1.2 | v42.14,52.43 42.14,32 38.33,28.19 38.33,27.05 SV3.7 | v79.78,72.31 81.08,71.02 84.96,71.02 J1.2 | v74.45,72.31 73.69,72.31 71.78,74.22 67.44,74.22 66.9,74.75 66.9,75.51 67.89,76.5 v72.31,76.5 | v42.52,60.43 44.58,60.43 MC1.P$11
  Bottom 0.152: v61.34,79.86 51.51,70.03 48.01,70.03 47.4,69.42 47.4,68.2 48.27,67.32 | 48.27,67.32 49,66.6 RN3.2 | v42.14,52.43 42.14,52.73 42.52,53.11 42.52,54.18 42.29,54.41 42.29,60.43 | 42.29,60.43 42.29,62.33 44.2,64.24 45.19,64.24 48.27,67.32 | v74.45,72.31 v79.78,72.31 | v72.31,76.5 73.08,77.27 73.08,80.39 72.01,81.46 JG1.2 | 42.29,60.43 v42.52,60.43
THS
  Bottom 0.152: SV3.6 35.66,24.46 35.66,25.6 32.08,29.18 32.08,62.79 29.41,65.46 MC1.P$26
TX
  Top 0.152: SV3.1 38.33,19.43 38.33,20.57 43.36,25.6 43.36,49 44.58,50.22 MC1.P$15
VCC  (via drill 0.3)
  Top 0.508: C6.1 63.93,62.79 58.22,62.79 53.26,67.74 OK1.8 53.11,68.05 53.11,71.63 50.44,74.3 50.44,75.67 53.65,78.87 | 73.99,79.1 73.99,77.57 73.53,77.11 73.53,74.68 80.47,67.74 C7.1 80.7,67.59 83.21,65.08 84.96,65.08 J1.5 | 73.99,79.1 73.99,81.46 JG1.3 | 53.65,78.87 53.87,79.1 73.99,79.1 | v36.2,55.85 31.39,55.85 29.41,57.84 MC1.P$23 | v39.01,72.08 39.01,80.47 38.02,81.46 JG2.3 | v48.84,83.67 53.65,78.87
  Bottom 0.508: OK1.8 50.29,67.82 49.07,69.04 RN3.1 | C8.1 29.03,31.77 29.03,32.77 30.1,33.83 30.1,35.66 29.03,36.73 C9.1 29.11,36.96 29.11,37.8 30.79,39.47 30.79,56.46 29.41,57.84 MC1.P$23 | SV3.13 38.25,34.67 38.25,53.8 v36.2,55.85 36.27,56.08 36.27,63.4 39.01,66.14 v39.01,72.08 | X1.LVCC 10.21,72.69 11.2,72.69 12.27,71.63 15.62,71.63 16.69,72.69 16.69,73.91 23.24,80.47 24.23,80.47 27.28,83.52 27.28,86.11 28.73,87.55 31.93,87.55 37.95,81.53 JG2.3 38.18,81.31 39.09,80.39 40.46,80.39 41.07,81 41.07,84.28 44.04,87.25 45.26,87.25 v48.84,83.67
VIN  (via drill 0.3)
  Top 1.016: 66.52,35.66 66.52,34.21 66.37,34.06 D10.C | 66.52,35.66 66.52,40.31 66.37,40.46 66.37,43.97 D6.C | 66.52,35.66 58.06,35.66 56.46,34.06 55.32,34.06 D9.C | D5.C 55.32,43.97 55.32,40.54 55.47,40.39 v55.47,36.88 55.02,36.65 53.34,36.65 44.96,28.27 44.96,23.55 v39.32,17.91 | D16.C 88.32,27.43 88.47,27.58 88.47,33.83 88.32,33.98 D12.C 88.47,34.44 88.47,40.39 88.32,40.54 88.32,43.97 D8.C 88.47,44.5 88.47,50.37 88.32,50.52 88.32,53.95 D4.C | D15.C 77.34,24 77.34,27.51 77.5,27.66 77.5,33.83 77.34,33.98 D11.C | D7.C 77.34,44.04 77.34,47.47 77.5,47.62 77.5,53.8 77.34,53.95 D3.C | v66.83,51.13 66.83,53.49 66.37,53.95 D2.C | SV2.32 31.77,9.75 34.21,9.75 SV2.30 34.75,9.75 36.73,9.75 SV2.28 | SV2.26 39.4,9.75 41.83,9.75 SV2.24 42.37,9.75 44.35,9.75 SV2.22 44.96,9.75 46.94,9.75 SV2.20 47.4,9.75 49.45,9.75 SV2.18 49.99,9.75 51.97,9.75 SV2.16 52.58,9.75 54.56,9.75 SV2.14 55.02,9.75 57.07,9.75 SV2.12 57.61,9.75 59.59,9.75 SV2.10 60.2,9.75 62.18,9.75 SV2.8 62.64,9.75 64.69,9.75 SV2.6 | X1.RV+ 7.54,14.33 7.54,16.92 5.41,19.05 X1.V+15 5.11,19.43 5.11,21.87 X1.V+14 5.11,22.4 5.11,24.38 X1.V+13 5.11,24.92 5.11,26.98 X1.V+12 5.03,27.51 5.03,31.55 X1.V+11 5.11,32.08 5.11,34.59 X1.V+10 5.11,35.13 5.11,37.11 X1.V+09 5.11,37.64 5.11,39.62 X1.V+08 5.03,40.16 5.03,46.79 X1.V+07 5.11,47.32 5.11,49.84 X1.V+06 5.11,50.37 5.11,52.35 X1.V+05 5.11,52.88 5.11,54.86 X1.V+04 | X1.V+03 5.11,60.05 5.11,62.48 X1.V+02 5.11,63.02 5.11,65.08 X1.V+01 5.11,65.61 5.11,67.59 X1.V+00 5.41,67.97 7.54,70.1 7.54,72.69 X1.LV+ | v23.39,59.89 23.39,56.46 29.34,50.52 29.34,50.29 MC1.P$20 29.64,49.84 31.77,47.7 v31.77,23.39
  Top 1.016: v21.87,60.12 21.87,60.81 26.52,65.46 26.52,72.77 23.32,75.97 22.55,75.97 J0.3
  Bottom 1.016: D5.C 55.32,44.04 55.32,47.47 55.47,47.62 55.47,53.8 55.32,53.95 D1.C | D13.C 55.32,27.43 55.47,27.58 55.47,33.83 55.32,33.98 D9.C 55.47,34.44 v55.47,36.88 | D14.C 66.37,24 66.37,27.51 66.52,27.66 66.52,33.83 66.37,33.98 D10.C | D2.C 66.37,54.03 67.44,54.03 69.04,55.63 75.67,55.63 77.27,54.03 D3.C | 77.5,42.37 77.5,43.81 77.34,43.97 D7.C | 77.5,42.37 77.5,37.64 77.34,37.49 77.34,34.06 D11.C | 77.5,42.37 81.38,42.37 82.98,43.97 88.24,43.97 D8.C | v66.83,51.13 66.83,47.55 66.37,47.09 66.37,44.04 D6.C | SV2.6 64.77,9.75 67.21,9.75 SV2.4 67.82,9.75 69.8,9.75 SV2.2 | SV2.28 36.8,9.75 39.32,9.75 SV2.26 | 21.87,59.89 9.3,59.89 8.08,58.67 6.4,58.67 | 21.87,59.89 v23.39,59.89 | 6.4,58.67 5.11,59.97 X1.V+03 | v21.87,60.12 21.87,59.89 | X1.V+04 5.11,54.94 5.11,57.15 6.17,58.22 6.4,58.67 | SV2.32 31.7,9.68 31.09,9.68 23.39,1.98 15.39,1.98 14.63,2.74 14.63,9.53 17.75,12.65 17.75,15.39 15.93,17.22 10.52,17.22 7.62,14.33 X1.RV+ | v39.32,17.91 34.06,17.91 31.77,20.19 v31.77,23.39

## Text on the board
bPlace: GND | Vin
tNames: DC12V | SCL | SDA | Vcc | GND | SCL | SDA | Vcc | GND | * | Grove | Grove | A | MKR | 0 | GND | 2-103 | SDA | 1 | * | * | SCL | 2 | MIDI | 221 | D7 | 103 | 3 | Vcc | * | * | * | * | * | TLP2630 | 103 | 472 | * | Arduino Micro | MC1 | 104 | X3 | Vcc | 103 | X2 | D7 | X1 | SCL | X0 | SDA | Test Port II | * | 331 | TH | GND | G1 | RX | G0 | TX | * | 331 | * | Pineapple IIgs 0.0.1-X | 4-M2.3 | K | Designed for / Takachi / PF10-4-10 | R | G | *
bNames: Vdd | Grove | Grove | V+ | MKR | Vcc | Vin